# Allegro board newBoardCircle.brd
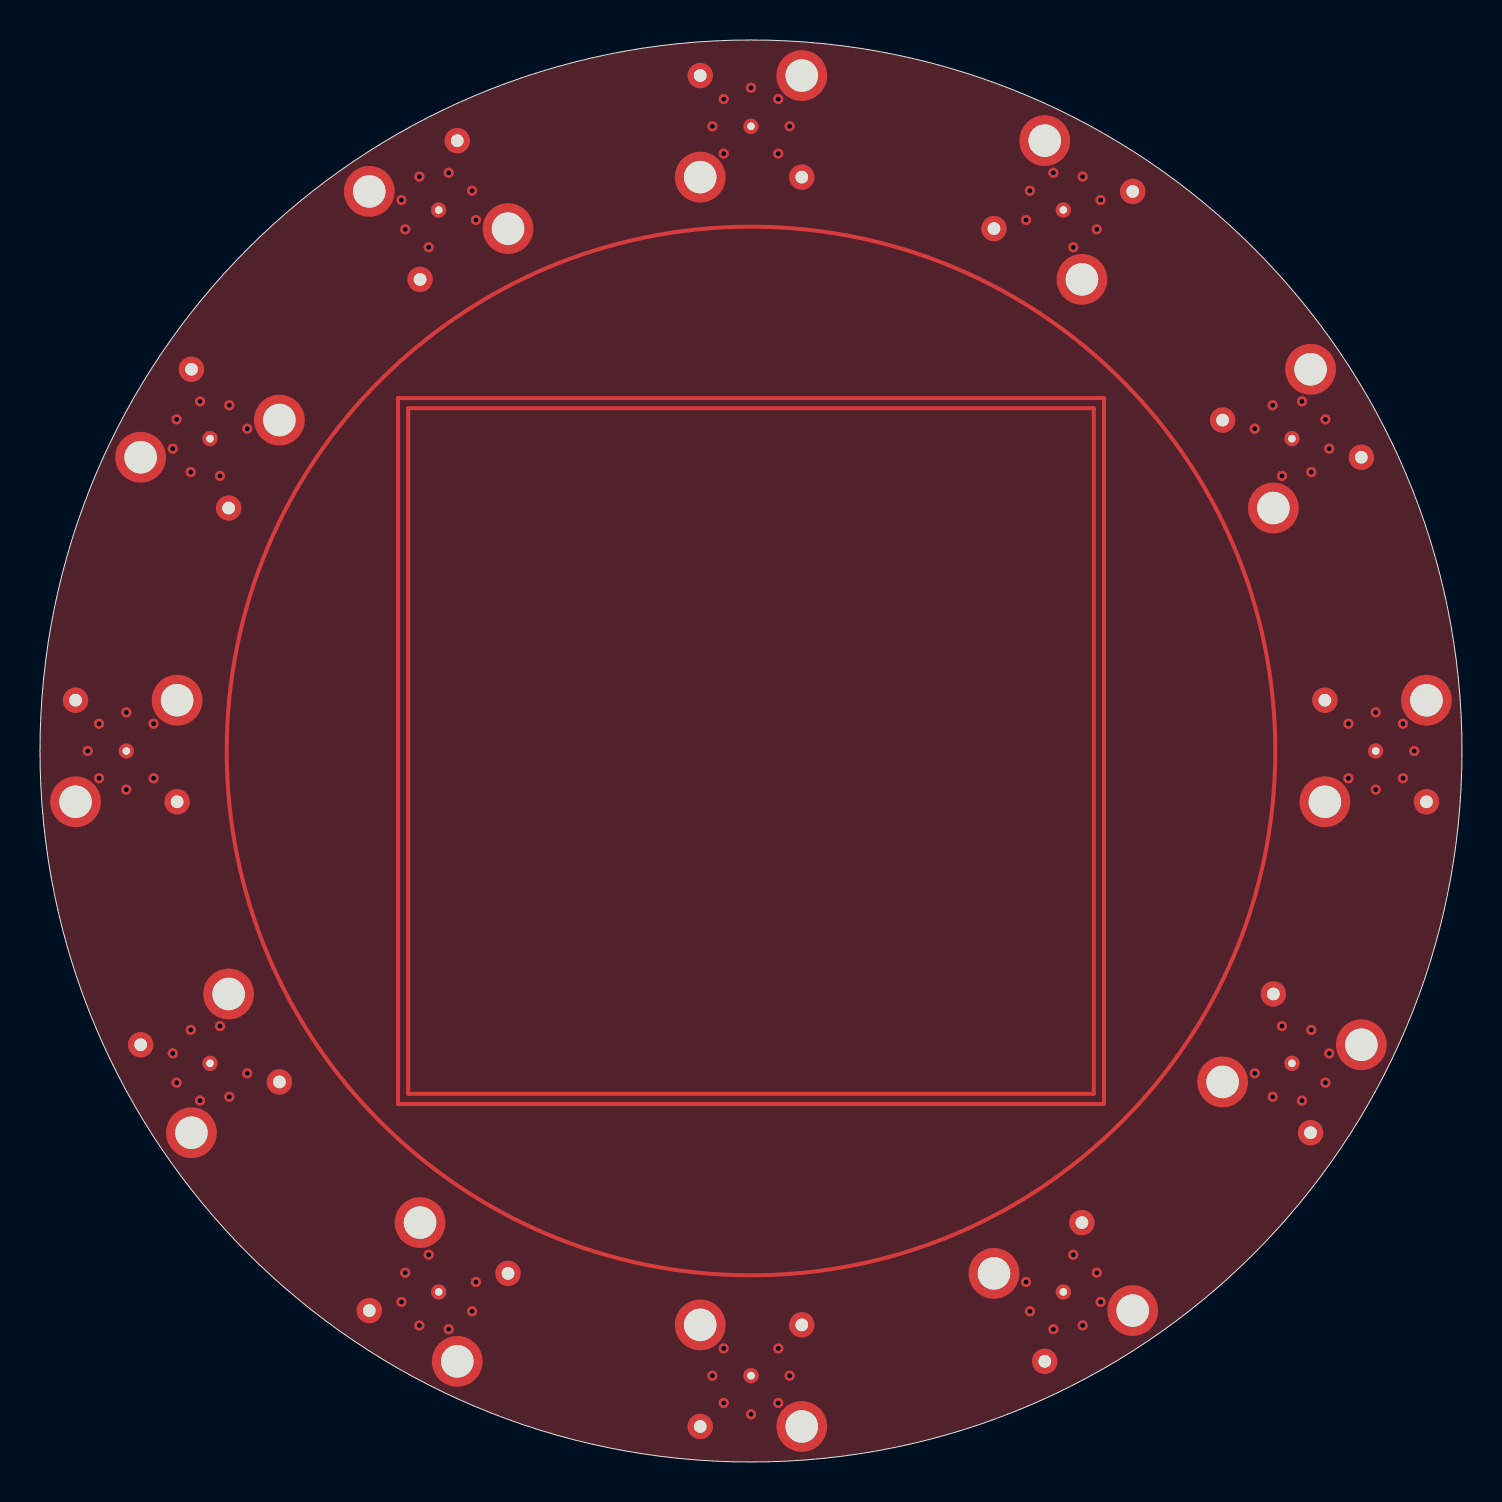
[diagram p0: board, top side]
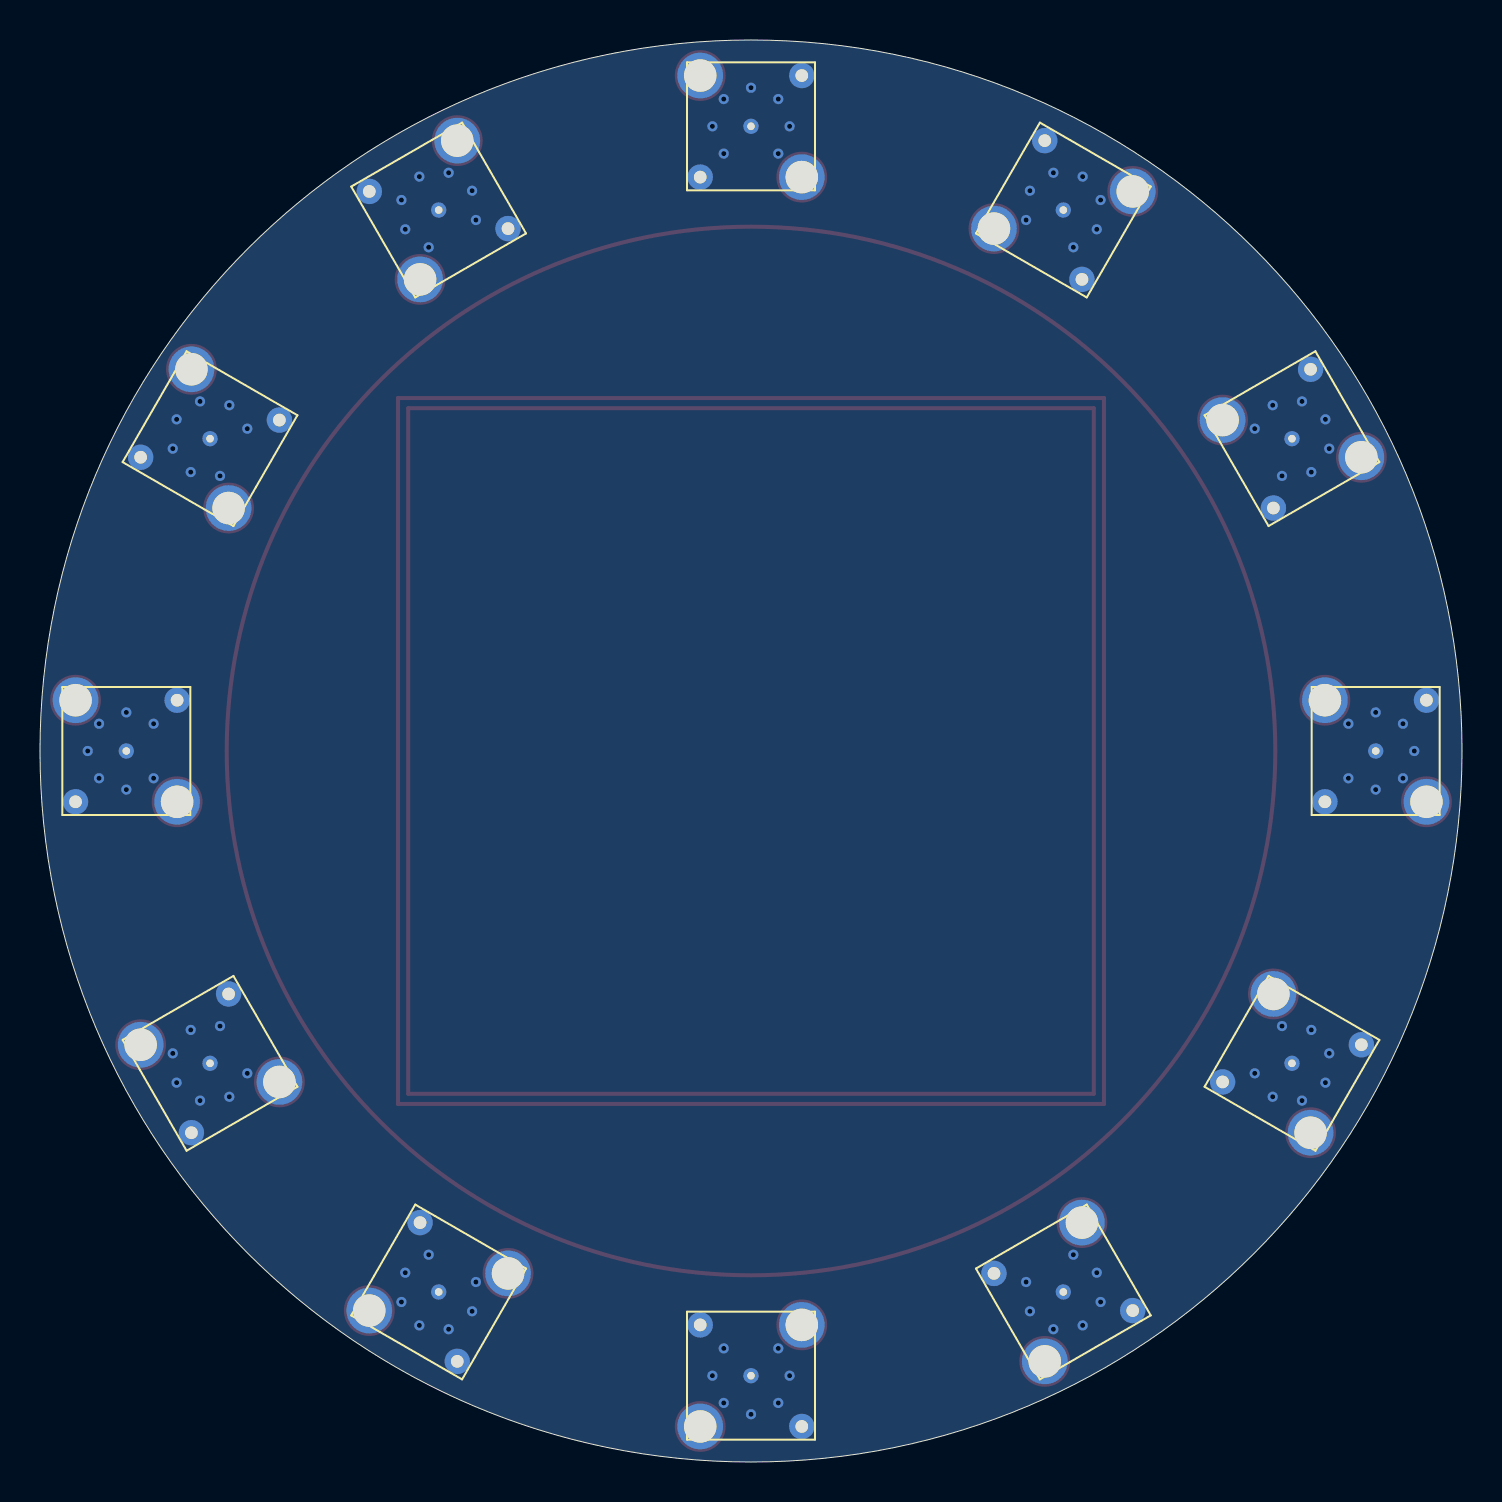
[diagram p1: board, bottom side, seen from below]

Outline 71.12 x 71.12 mm; copper layers: TOP, 02_GND, 03_SIG, BOTTOM. Coordinates in mm from the lower left corner of the outline.
Outline path: circle c35.56,35.56 r35.56

## Placement (name value [footprint] x y rotation side)
J1  -  [SSMA_BB]  66.8 35.56 180 bottom
J2  -  [SSMA_BB]  62.62 51.18 210 bottom
J3  -  [SSMA_BB]  51.18 62.62 240 bottom
J4  -  [SSMA_BB]  35.56 66.8 180 bottom
J5  -  [SSMA_BB]  19.94 62.62 120 bottom
J6  -  [SSMA_BB]  8.5 51.18 150 bottom
J7  -  [SSMA_BB]  4.32 35.56 180 bottom
J8  -  [SSMA_BB]  8.5 19.94 210 bottom
J9  -  [SSMA_BB]  19.94 8.5 240 bottom
J10  -  [SSMA_BB]  35.56 4.32 90 bottom
J11  -  [SSMA_BB]  51.18 8.5 120 bottom
J12  -  [SSMA_BB]  62.62 19.94 150 bottom

## Library data of the parts
J1-J12 = SSMA_BB

## Footprints (pads in the part's own frame, mm; a bottom-side part is the same pattern mirrored in y, then rotated)
SSMA_BB
  round 1.27 hole 0.635: (-2.54,-2.54) (2.54,2.54)
  round 0.762 hole 0.381: 1(0,0)
  round 2.54 hole 1.626: 2(-2.54,2.54) 3(2.54,-2.54)

## Nets
GND: J1.2(TP-2) J1.3(TP-3) J2.2(TP-2) J2.3(TP-3) J3.2(TP-2) J3.3(TP-3) J4.2(TP-2) J4.3(TP-3) J5.2(TP-2) J5.3(TP-3) J6.2(TP-2) J6.3(TP-3) J7.2(TP-2) J7.3(TP-3) J8.2(TP-2) J8.3(TP-3) J9.2(TP-2) J9.3(TP-3) J10.2(TP-2) J10.3(TP-3) J11.2(TP-2) J11.3(TP-3) J12.2(TP-2) J12.3(TP-3)
MICROWAVE: J1.1(TP-1) J2.1(TP-1) J3.1(TP-1) J4.1(TP-1) J5.1(TP-1) J6.1(TP-1) J7.1(TP-1) J8.1(TP-1) J9.1(TP-1) J10.1(TP-1) J11.1(TP-1) J12.1(TP-1)

## Via types
v1: diameter 0.508, hole 0.254, TOP to BOTTOM, 84 vias

## Routing (per net, layer and track width the routed paths; a pad name or vN(x,y) marks a point on that pad's centre or on a via; arc(x,y) is an arc through that point)
GND: length 126.8
  03_SIG w0.33: J11.3 47.71,10.75 ; J11.3 49.03,9.43 ; J11.3 47.71,8.11 ; J11.3 46.39,9.43 ; 62.94,33.02 J1.3 ; J1.3 65.58,33.02 ; J1.3 64.26,34.34 ; J1.3 64.26,31.7 ; 16.47,62.22 J5.3 ; J5.3 15.15,63.55 ; J5.3 16.47,64.87 ; J5.3 17.79,63.55 ; 53.33,7.57 J11.2 ; J11.2 55.97,7.57 ; J11.2 54.65,6.25 ; J11.2 54.65,8.9 ; J8.3 7.57,17.79 ; J8.3 8.9,16.47 ; J8.3 6.25,16.47 ; J8.3 7.57,15.15 ; J7.3 1.78,34.34 ; J7.3 3.1,33.02 ; J7.3 1.78,31.7 ; J7.3 0.46,33.02 ; J10.3 33.02,8.18 ; J10.3 31.7,6.86 ; J10.3 34.34,6.86 ; J10.3 33.02,5.54 ; J2.3 63.01,47.71 ; J2.3 61.69,49.03 ; J2.3 60.37,47.71 ; J2.3 61.69,46.39 ; J8.2 9.43,24.73 ; J8.2 10.75,23.41 ; J8.2 9.43,22.09 ; J8.2 8.11,23.41 ; 22.09,61.69 J5.2 ; J5.2 23.41,60.37 ; J5.2 23.41,63.01 ; J5.2 24.73,61.69 ; 17.69,11.97 J9.2 ; J9.2 19.01,13.29 ; J9.2 19.01,10.65 ; J9.2 20.33,11.97 ; 20.87,3.71 J9.3 ; J9.3 19.55,5.03 ; J9.3 22.19,5.03 ; J9.3 20.87,6.36 ; J1.2 69.34,39.42 ; J1.2 68.02,38.1 ; J1.2 70.66,38.1 ; J1.2 69.34,36.78 ; J4.2 38.1,70.66 ; J4.2 36.78,69.34 ; J4.2 39.42,69.34 ; J4.2 38.1,68.02 ; 6.86,36.78 J7.2 ; J7.2 6.86,39.42 ; J7.2 8.18,38.1 ; J7.2 5.54,38.1 ; 3.71,50.25 J6.3 ; J6.3 6.36,50.25 ; J6.3 5.03,51.57 ; J6.3 5.03,48.93 ; 64.76,20.87 J12.2 ; J12.2 67.41,20.87 ; J12.2 66.09,22.19 ; J12.2 66.09,19.55 ; 50.79,59.15 J3.3 ; J3.3 52.11,60.47 ; J3.3 53.43,59.15 ; J3.3 52.11,57.83 ; J4.3 34.34,64.26 ; J4.3 33.02,65.58 ; J4.3 31.7,64.26 ; J4.3 33.02,62.94 ; 36.78,1.78 J10.2 ; J10.2 39.42,1.78 ; J10.2 38.1,0.46 ; J10.2 38.1,3.1 ; J3.2 51.57,66.09 ; J3.2 50.25,67.41 ; J3.2 48.93,66.09 ; J3.2 50.25,64.76 ; 11.97,50.79 J6.2 ; J6.2 11.97,53.43 ; J6.2 13.29,52.11 ; J6.2 10.65,52.11 ; 59.15,17.69 J12.3 ; J12.3 60.47,19.01 ; J12.3 57.83,19.01 ; J12.3 59.15,20.33 ; 62.22,54.65 J2.2 ; J2.2 64.87,54.65 ; J2.2 63.55,53.33 ; J2.2 63.55,55.97
  vias: v1(2.39,35.56) v1(2.95,36.92) v1(2.95,34.2) v1(4.32,37.49) v1(4.32,33.63) v1(5.68,36.92) v1(5.68,34.2) v1(6.64,50.68) v1(6.64,20.44) v1(6.83,52.15) v1(6.83,18.97) v1(7.54,49.51) v1(7.54,21.61) v1(8,53.04) v1(8,18.08) v1(9,49.32) v1(9,21.8) v1(9.47,52.85) v1(9.47,18.27) v1(10.37,51.68) v1(10.37,19.44) v1(18.08,63.12) v1(18.08,8) v1(18.27,61.65) v1(18.27,9.47) v1(18.97,64.29) v1(18.97,6.83) v1(19.44,60.75) v1(19.44,10.37) v1(20.44,64.48) v1(20.44,6.64) v1(21.61,63.58) v1(21.61,7.54) v1(21.8,62.12) v1(21.8,9) v1(33.63,66.8) v1(33.63,4.32) v1(34.2,68.17) v1(34.2,65.44) v1(34.2,5.68) v1(34.2,2.95) v1(35.56,68.73) v1(35.56,2.39) v1(36.92,68.17) v1(36.92,65.44) v1(36.92,5.68) v1(36.92,2.95) v1(37.49,66.8) v1(37.49,4.32) v1(49.32,62.12) v1(49.32,9) v1(49.51,63.58) v1(49.51,7.54) v1(50.68,64.48) v1(50.68,6.64) v1(51.68,60.75) v1(51.68,10.37) v1(52.15,64.29) v1(52.15,6.83) v1(52.85,61.65) v1(52.85,9.47) v1(53.04,63.12) v1(53.04,8) v1(60.75,51.68) v1(60.75,19.44) v1(61.65,52.85) v1(61.65,18.27) v1(62.12,49.32) v1(62.12,21.8) v1(63.12,53.04) v1(63.12,18.08) v1(63.58,49.51) v1(63.58,21.61) v1(64.29,52.15) v1(64.29,18.97) v1(64.48,50.68) v1(64.48,20.44) v1(65.44,36.92) v1(65.44,34.2) v1(66.8,37.49) v1(66.8,33.63) v1(68.17,36.92) v1(68.17,34.2) v1(68.73,35.56)
MICROWAVE: length 374.9
  03_SIG w0.127: J4.1 J10.1
  03_SIG w0.33: J7.1 J1.1 ; J3.1 J9.1 ; J6.1 J12.1 ; J2.1 J8.1 ; J5.1 J11.1

## Copper pours and planes (outline as drawn; the poured copper is in the pictures)
GND on TOP, BOTTOM, 02_GND, 03_SIG: 0,35.56 71.12,35.56
